# Altium PCB RF_switch_ckt.PcbDoc
Units mil, origin at the board's own origin, x right, y up, seen from the top; angles counter-clockwise.
Board outline 778 x 287 mil, 4 copper layers (Top Layer, Layer 1, Layer 2, Bottom Layer), stack 31.891 mil thick; 5 components, 22 nets, 23 pads, 0 vias.
Unrouted connection lines stored in the file: 12.
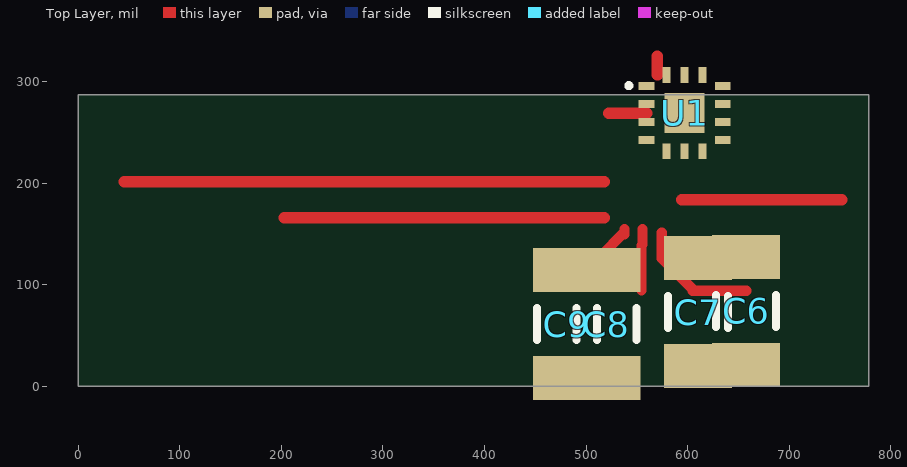
[diagram p0: Top Layer view]
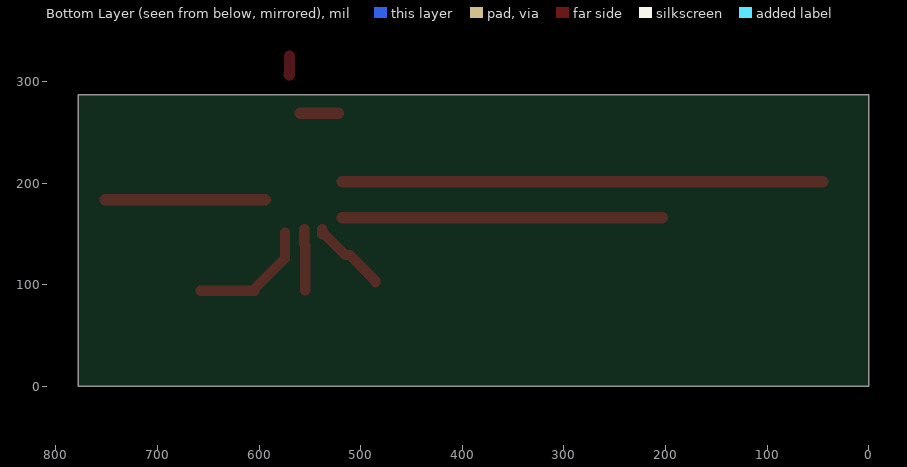
[diagram p1: Bottom Layer view, seen from below]

## Layer stack, top to bottom
Top Solder: solder mask 0.4, Solder Resist, Dk 3.5
Top Layer: signal copper 1.3779
Isola 408HR-1: prepreg 6.8898, FR4, Dk 3.64
Layer 1: signal copper 1.3779
Isola 408HR-Core: dielectric 12.6, FR-4, Dk 3.64
Layer 2: signal copper 1.3779
Isola 408HR-2: prepreg 6.8898, FR4, Dk 3.64
Bottom Layer: signal copper 1.3779
Bottom Solder: solder mask 0.4, Solder Resist, Dk 3.5

## Board outline
0,0 778,0 778,287 0,287

## Design rules (kind name [scope] priority, off if disabled: settings)
BoardOutlineClearance [All] p1: gap=10 ignorepadtopadclearanceinfootprint=FALSE except(0: Arc-SplitContinuation Track-SplitContinuation SMDPad-SplitContinuation THPad-SplitContinuation Via-SplitContinuation Fill-SplitContinuation Poly-SplitContinuation Region-SplitContinuation Text-SplitContinuation; 12: Arc-OutlineEdge Track-OutlineEdge SMDPad-OutlineEdge THPad-OutlineEdge Via-OutlineEdge Fill-OutlineEdge Poly-OutlineEdge Region-OutlineEdge Text-OutlineEdge)
Clearance "Schematic Clearance Constraint_13" [InNet('Sig2')] p1: gap=10 ignorepadtopadclearanceinfootprint=FALSE except(0: Arc-Fill Arc-Poly Arc-Region Track-Fill Track-Poly Track-Region)
Clearance "Schematic Clearance Constraint_12" [InNet('TRAN_rect')] p2: gap=10 ignorepadtopadclearanceinfootprint=FALSE except(0: SMDPad-Fill SMDPad-Poly SMDPad-Region)
Clearance "Schematic Clearance Constraint_11" [InNet('TRAN_rect')] p3: gap=10 ignorepadtopadclearanceinfootprint=FALSE except(0: Arc-SMDPad Track-SMDPad)
Clearance "Schematic Clearance Constraint_10" [InNet('RF1')] p4: gap=5 ignorepadtopadclearanceinfootprint=FALSE except(0: Arc-Hole Track-Hole SMDPad-Hole THPad-Hole Via-Hole Fill-Hole Poly-Hole Region-Hole Text-Hole)
Clearance "Schematic Clearance Constraint_9" [InNet('RF3')] p5: gap=5 ignorepadtopadclearanceinfootprint=FALSE except(0: Arc-Hole Track-Hole SMDPad-Hole THPad-Hole Via-Hole Fill-Hole Poly-Hole Region-Hole Text-Hole)
Clearance "Schematic Clearance Constraint_8" [InNet('RF4')] p6: gap=5 ignorepadtopadclearanceinfootprint=FALSE except(0: Arc-Hole Track-Hole SMDPad-Hole THPad-Hole Via-Hole Fill-Hole Poly-Hole Region-Hole Text-Hole)
Clearance "Schematic Clearance Constraint_7" [InNet('RF2')] p7: gap=5 ignorepadtopadclearanceinfootprint=FALSE except(0: Arc-Hole Track-Hole SMDPad-Hole THPad-Hole Via-Hole Fill-Hole Poly-Hole Region-Hole Text-Hole)
Clearance "Schematic Clearance Constraint_6" [InNet('Sig1')] p8: gap=10 ignorepadtopadclearanceinfootprint=FALSE
Clearance "Schematic Clearance Constraint_5" [InNet('Sig3')] p9: gap=10 ignorepadtopadclearanceinfootprint=FALSE
Clearance "Schematic Clearance Constraint_4" [InNet('CPWG55')] p10: gap=10 ignorepadtopadclearanceinfootprint=FALSE
Clearance "Schematic Clearance Constraint_3" [InNet('CPWG45')] p11: gap=10 ignorepadtopadclearanceinfootprint=FALSE
Clearance "Schematic Clearance Constraint_2" [InNet('CPWG50')] p12: gap=10 ignorepadtopadclearanceinfootprint=FALSE
Clearance "Schematic Clearance Constraint_1" [InNet('TRAN_smooth')] p13: gap=10 ignorepadtopadclearanceinfootprint=FALSE
Clearance "Schematic Clearance Constraint" [InNet('RFC')] p14: gap=5 ignorepadtopadclearanceinfootprint=FALSE except(0: Arc-Hole Track-Hole SMDPad-Hole THPad-Hole Via-Hole Fill-Hole Poly-Hole Region-Hole Text-Hole)
Clearance [All] p15: gap=3 ignorepadtopadclearanceinfootprint=FALSE
HoleSize [All] p1: absolutevalues=TRUE maxlimit=100 minlimit=4 maxpercent=80.000 minpercent=20.000
MaxMinImpedance "Schematic Impedance Constraint_2" [InNet('CPWG55')] p1: minimum=55.00 maximum=55.00
MaxMinImpedance "Schematic Impedance Constraint_1" [InNet('CPWG50')] p2: minimum=50.00 maximum=50.00
MaxMinImpedance "Schematic Impedance Constraint" [InNet('CPWG45')] p3: minimum=45.00 maximum=45.00
NetAntennae [All] p1: netantennaetolerance=500
PolygonConnect [All] p1: connectstyle=Relief reliefconductorwidth=10 reliefentries=4 polygonreliefangle="90 Angle" airgapwidth=10
RoomDefinition U_RF_switch_ckt [InComponentClass('U_RF_switch_ckt')] p1: confinementstyle=ConfineIn formatcopy=TRUE lockcomponents=FALSE outline 773,278.43 13.5,278.43 13.5,11.43 773,11.43
RoutingVias [All] p1: holewidth=10 width=14 viastyle="Through Hole" minholewidth=5 minwidth=7 maxholewidth=28 maxwidth=50
SolderMaskExpansion [All] p1: expansion=4
Width "Schematic Width Constraint_16" [InNet('TRAN_rect')] p1: maxlimit=97.14 minlimit=10 preferedwidth=13.72 toplayer_minwidth=13.72 midlayer1_maxwidth=10 midlayer1_prefwidth=10 midlayer2_maxwidth=10 midlayer2_prefwidth=10 bottomlayer_minwidth=13.72 minimp=50.000000 maximp=50.000000 favimp=50.000000
Width "Schematic Width Constraint_15" [InNet('Sig3')] p2: maxlimit=97.14 minlimit=10 preferedwidth=13.72 toplayer_minwidth=13.72 midlayer1_maxwidth=10 midlayer1_prefwidth=10 midlayer2_maxwidth=10 midlayer2_prefwidth=10 bottomlayer_minwidth=13.72 minimp=50.000000 maximp=50.000000 favimp=50.000000
Width "Schematic Width Constraint_14" [InNet('Sig2')] p3: maxlimit=97.14 minlimit=10 preferedwidth=13.72 toplayer_minwidth=13.72 midlayer1_maxwidth=10 midlayer1_prefwidth=10 midlayer2_maxwidth=10 midlayer2_prefwidth=10 bottomlayer_minwidth=13.72 minimp=50.000000 maximp=50.000000 favimp=50.000000
Width "Schematic Width Constraint_13" [InNet('TRAN_sharp')] p4: maxlimit=97.14 minlimit=10 preferedwidth=13.72 toplayer_minwidth=13.72 midlayer1_maxwidth=10 midlayer1_prefwidth=10 midlayer2_maxwidth=10 midlayer2_prefwidth=10 bottomlayer_minwidth=13.72 minimp=50.000000 maximp=50.000000 favimp=50.000000
Width "Schematic Width Constraint_11" [InNet('Sig1')] p5: maxlimit=97.14 minlimit=10 preferedwidth=13.72 toplayer_minwidth=13.72 midlayer1_maxwidth=10 midlayer1_prefwidth=10 midlayer2_maxwidth=10 midlayer2_prefwidth=10 bottomlayer_minwidth=13.72 minimp=50.000000 maximp=50.000000 favimp=50.000000
Width "Schematic Width Constraint_17" [InNet('CPWG45')] p6: maxlimit=16.41 minlimit=16.41 preferedwidth=16.41 midlayer1_prefwidth=10 midlayer2_prefwidth=10 minimp=50.000000 maximp=50.000000 favimp=50.000000
Width "Schematic Width Constraint_12" [InNet('TRAN_smooth')] p7: maxlimit=97.14 minlimit=10 preferedwidth=13.72 toplayer_minwidth=13.72 midlayer1_maxwidth=10 midlayer1_prefwidth=10 midlayer2_maxwidth=10 midlayer2_prefwidth=10 bottomlayer_minwidth=13.72 minimp=50.000000 maximp=50.000000 favimp=50.000000
Width "Schematic Width Constraint_10" [InNet('CPWG50')] p8: maxlimit=13.72 minlimit=13.72 preferedwidth=13.72 midlayer1_maxwidth=10 midlayer1_prefwidth=10 midlayer2_maxwidth=10 midlayer2_prefwidth=10 minimp=50.000000 maximp=50.000000 favimp=50.000000
Width "Schematic Width Constraint_9" [InNet('RF4')] p9: maxlimit=11.28 minlimit=10 preferedwidth=11.28 toplayer_minwidth=11.28 midlayer1_maxwidth=10 midlayer1_prefwidth=10 midlayer2_maxwidth=10 midlayer2_prefwidth=10 bottomlayer_minwidth=11.28 minimp=50.000000 maximp=50.000000 favimp=50.000000
Width "Schematic Width Constraint_4" [InNet('RF2')] p10: maxlimit=11.28 minlimit=10 preferedwidth=11.28 toplayer_minwidth=11.28 midlayer1_maxwidth=10 midlayer1_prefwidth=10 midlayer2_maxwidth=10 midlayer2_prefwidth=10 bottomlayer_minwidth=11.28 minimp=50.000000 maximp=50.000000 favimp=50.000000
Width "Schematic Width Constraint_3" [InNet('RF1')] p11: maxlimit=11.28 minlimit=10 preferedwidth=11.28 toplayer_minwidth=11.28 midlayer1_maxwidth=10 midlayer1_prefwidth=10 midlayer2_maxwidth=10 midlayer2_prefwidth=10 bottomlayer_minwidth=11.28 minimp=50.000000 maximp=50.000000 favimp=50.000000
Width "Schematic Width Constraint_2" [InNet('RF3')] p12: maxlimit=11.28 minlimit=10 preferedwidth=11.28 toplayer_minwidth=11.28 midlayer1_maxwidth=10 midlayer1_prefwidth=10 midlayer2_maxwidth=10 midlayer2_prefwidth=10 bottomlayer_minwidth=11.28 minimp=50.000000 maximp=50.000000 favimp=50.000000
Width "Schematic Width Constraint" [InNet('CPWG55')] p13: maxlimit=11.55 minlimit=11.55 preferedwidth=11.55 midlayer1_prefwidth=10 midlayer2_prefwidth=10 minimp=50.000000 maximp=50.000000 favimp=50.000000
Width "Schematic Width Constraint_1" [InNet('RFC')] p14: maxlimit=11.28 minlimit=10 preferedwidth=11.28 toplayer_minwidth=11.28 midlayer1_maxwidth=10 midlayer1_prefwidth=10 midlayer2_maxwidth=10 midlayer2_prefwidth=10 bottomlayer_minwidth=11.28 minimp=50.000000 maximp=50.000000 favimp=50.000000
Width [All] p15: maxlimit=10 minlimit=3 preferedwidth=10
28 further rules are at their usual default settings.

## Components (designator, comment, footprint, x,y, rotation, side; value= is the part's Value field where it differs from the comment)
C6 "Cap Semi" C1206 657.5,74.43 r90 top value=100pF
C7 "Cap Semi" C1206 610,73 r90 top value=100pF
C8 "Cap Semi" C1206 520,61.31 r90 top value=100pF
C9 "Cap Semi" C1206 481,61.31 r90 top value=100pF
U1 "SKY13575-639LF" *QFN45P200X200X55-15N 597,269 r0 top

## Footprints (in the part's own frame and the unit in brackets; to place one, negate y for a bottom-side part, rotate by r counter-clockwise, add the part's x,y. Pads: shape width x height; smd on the part's side, far side on the other; paste and mask are expansions set on the pad)
*QFN45P200X200X55-15N [mm]
  rect 0.395x0.2 smd: 1(-0.953,0.675) 2(-0.953,0.225) 3(-0.953,-0.225) 4(-0.953,-0.675) 8(0.953,-0.675) 9(0.953,-0.225) 10(0.953,0.225) 11(0.953,0.675)
  rect 0.2x0.395 smd: 5(-0.45,-0.953) 6(0,-0.953) 7(0.45,-0.953) 12(0.45,0.953) 13(0,0.953) 14(-0.45,0.953)
  rect 1x1 smd: 15(0,0)
  silkscreen extent -1.45,0.64 -1.35,0.74
C1206 [mm] "Chip Capacitor, Body 3.2x1.6mm, IPC High Density"
  rect 1.1x1.7 smd: 1(-1.35,0) 2(1.35,0)
  silkscreen extent -0.4,-0.75 0.4,0.75, body extent -1.7,-0.9 1.7,0.9, height 1.3

## Part data
C6 C7 C8 C9: "Capacitor (Semiconductor SIM Model)", LatestRevisionDate=29-May-2009, LatestRevisionNote="IPC-7351 Footprint Added.", PackageDescription="Chip Capacitor", PackageReference=C1206, Published=8-Jun-2000, Publisher="Altium Limited"

## Nets (pads, with @x,y where several pads share a name; then routed paths per layer and width w, separated by ;. In a path a pad name is that pad's centre, name@x,y a point inside that pad or via, vN(x,y) a via of type N, cw(c..) or ccw(c..) an arc to the next point about the centre after c; other vN are vias at no path point)
3V3: C6.2 C7.2 U1.10 | length 122.8
  Top Layer w10: 574.44,151.49 574.44,126.14 586.31,114.27 604.5,96.08 604.5,94.11 657.5,94.11
CPWG45: 
CPWG50: 
CPWG55: 
GND: C6.1 C7.1 U1.1 U1.3 U1.4 U1.6 U1.11 U1.13
GND_TRAN: 
GNDCPWG: 
RF1: U1.14 | length 18.7
  Top Layer w11.28: 570,325 570,306.93 570.43,306.5
RF2: U1.12 | length 157.5
  Top Layer w11.28: 593.88,183.57 751.42,183.57
RF3: U1.7 | length 315.1
  Top Layer w11.28: 202.92,165.85 518,165.85
RF4: U1.5 | length 472.6
  Top Layer w11.28: 45.38,201.28 518,201.28
RFC: U1.2 | length 37.5
  Top Layer w11.28: 522,269 559.5,269
Sig1: 
Sig2: 
Sig3: 
TRAN_rect: 
TRAN_sharp: 
TRAN_smooth: 
VC1: C9.2 U1.8 | length 76.1
  Top Layer w10: C9.2@485.5,102.11 485.5,104.08 510.75,129.32 515.1,129.32 535.5,149.73 ; 537.78,149.73 537.78,154.93
VC1IN: C9.1
VC2: C8.2 U1.9 | length 61
  Top Layer w10: 554.5,94.43 554.44,94.49 554.44,138.65 555.5,139.72 555.5,154.93
VC2IN: C8.1
pads on no net: U1.15